# Altium PCB Lampda_PCB_V1_1.pcbdoc (part 1 of 2)
Units mm, origin at the board's own origin, x right, y up, seen from the top; angles counter-clockwise.
Board outline 70.99 x 71.73 mm, 2 copper layers (Top Layer, Bottom Layer); 134 components, 139 nets, 552 pads, 286 vias.
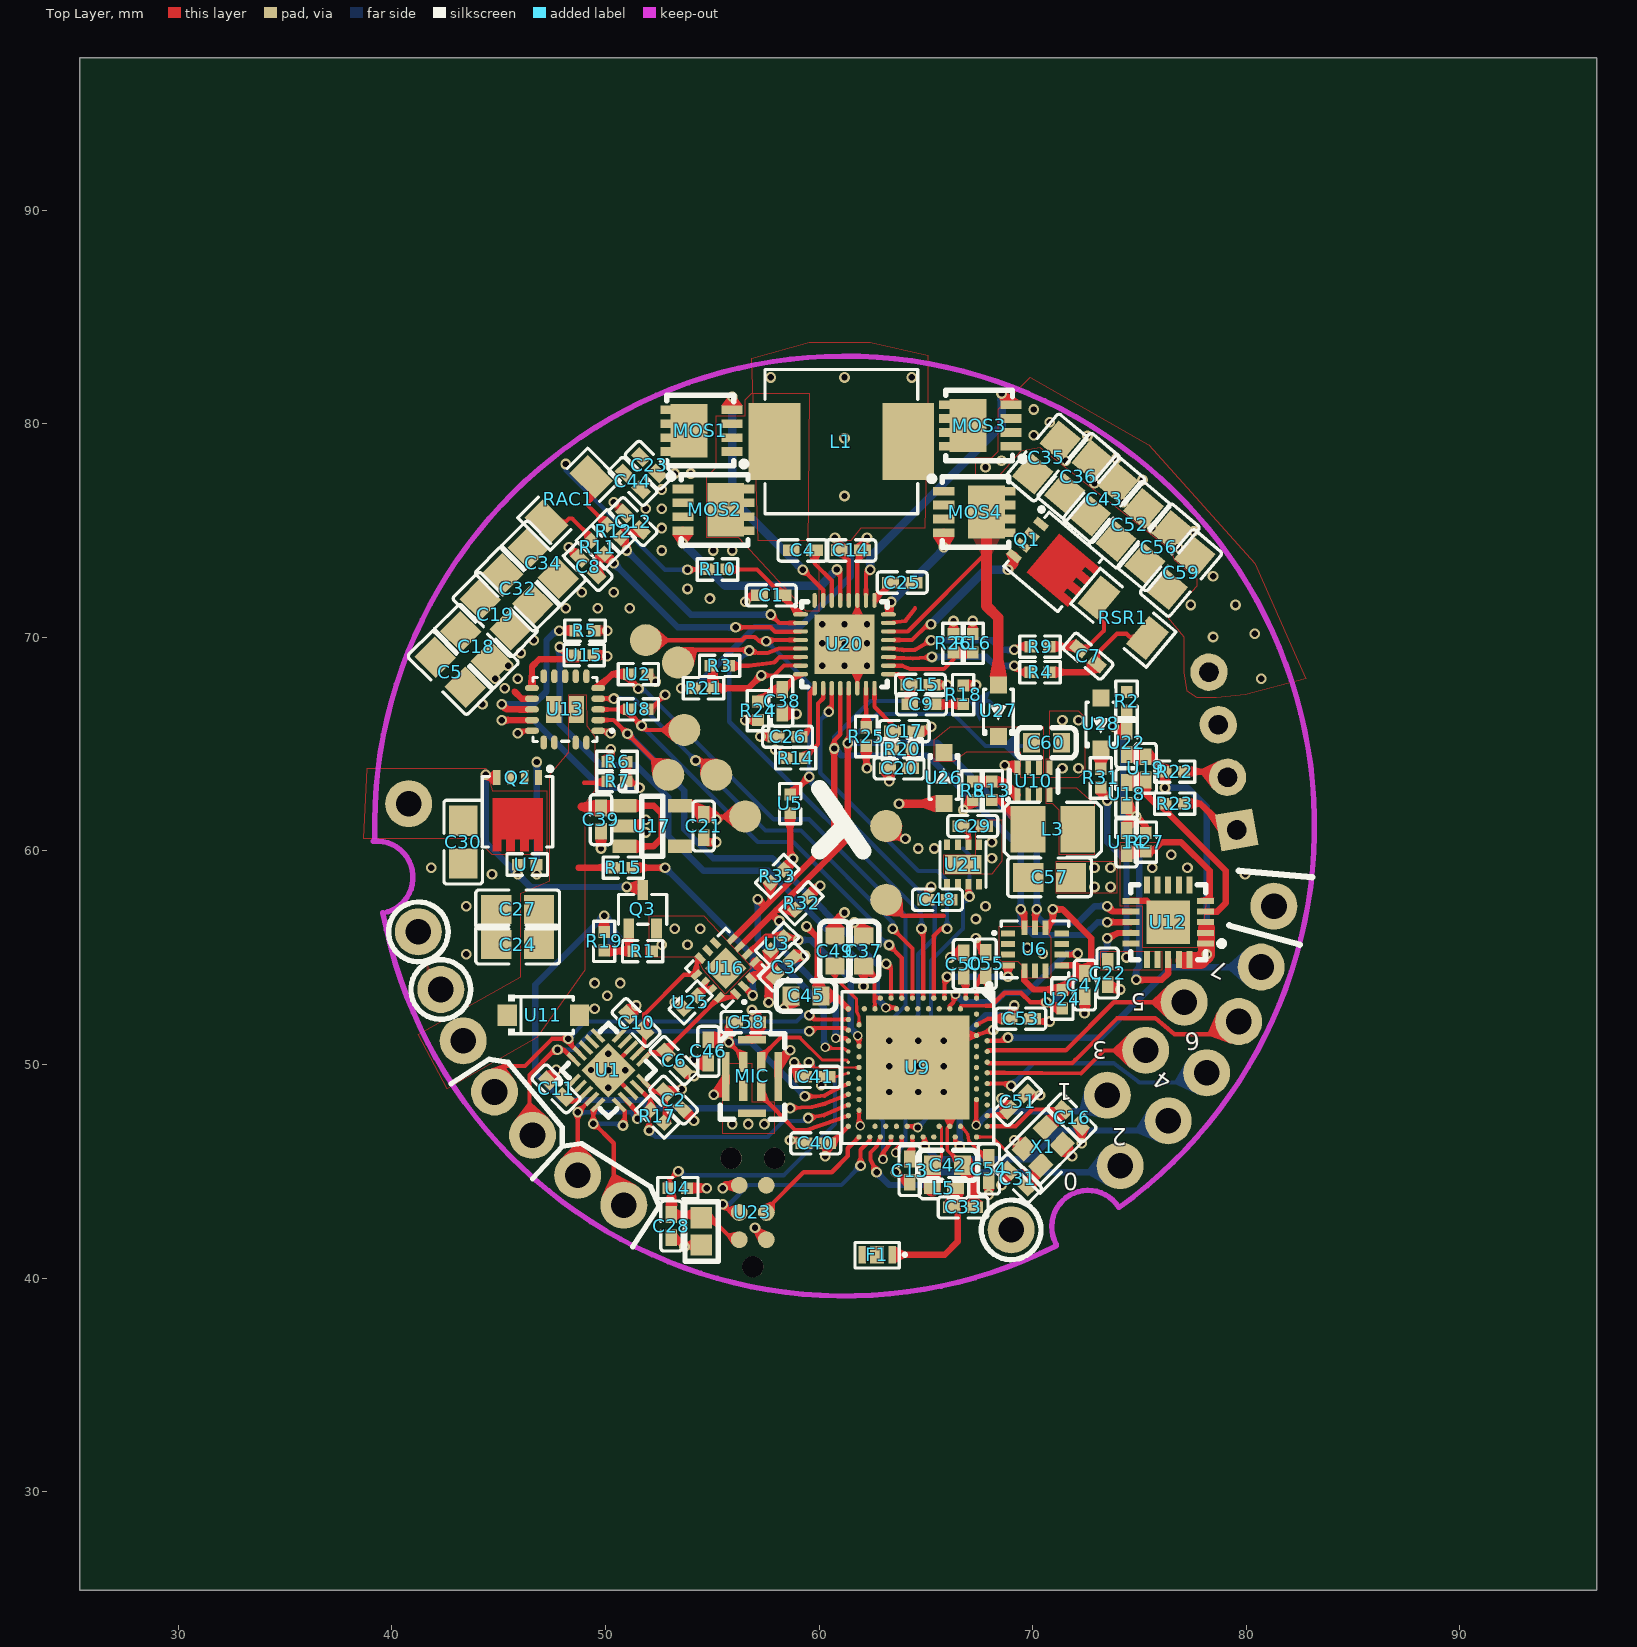
[diagram p0: Top Layer view]
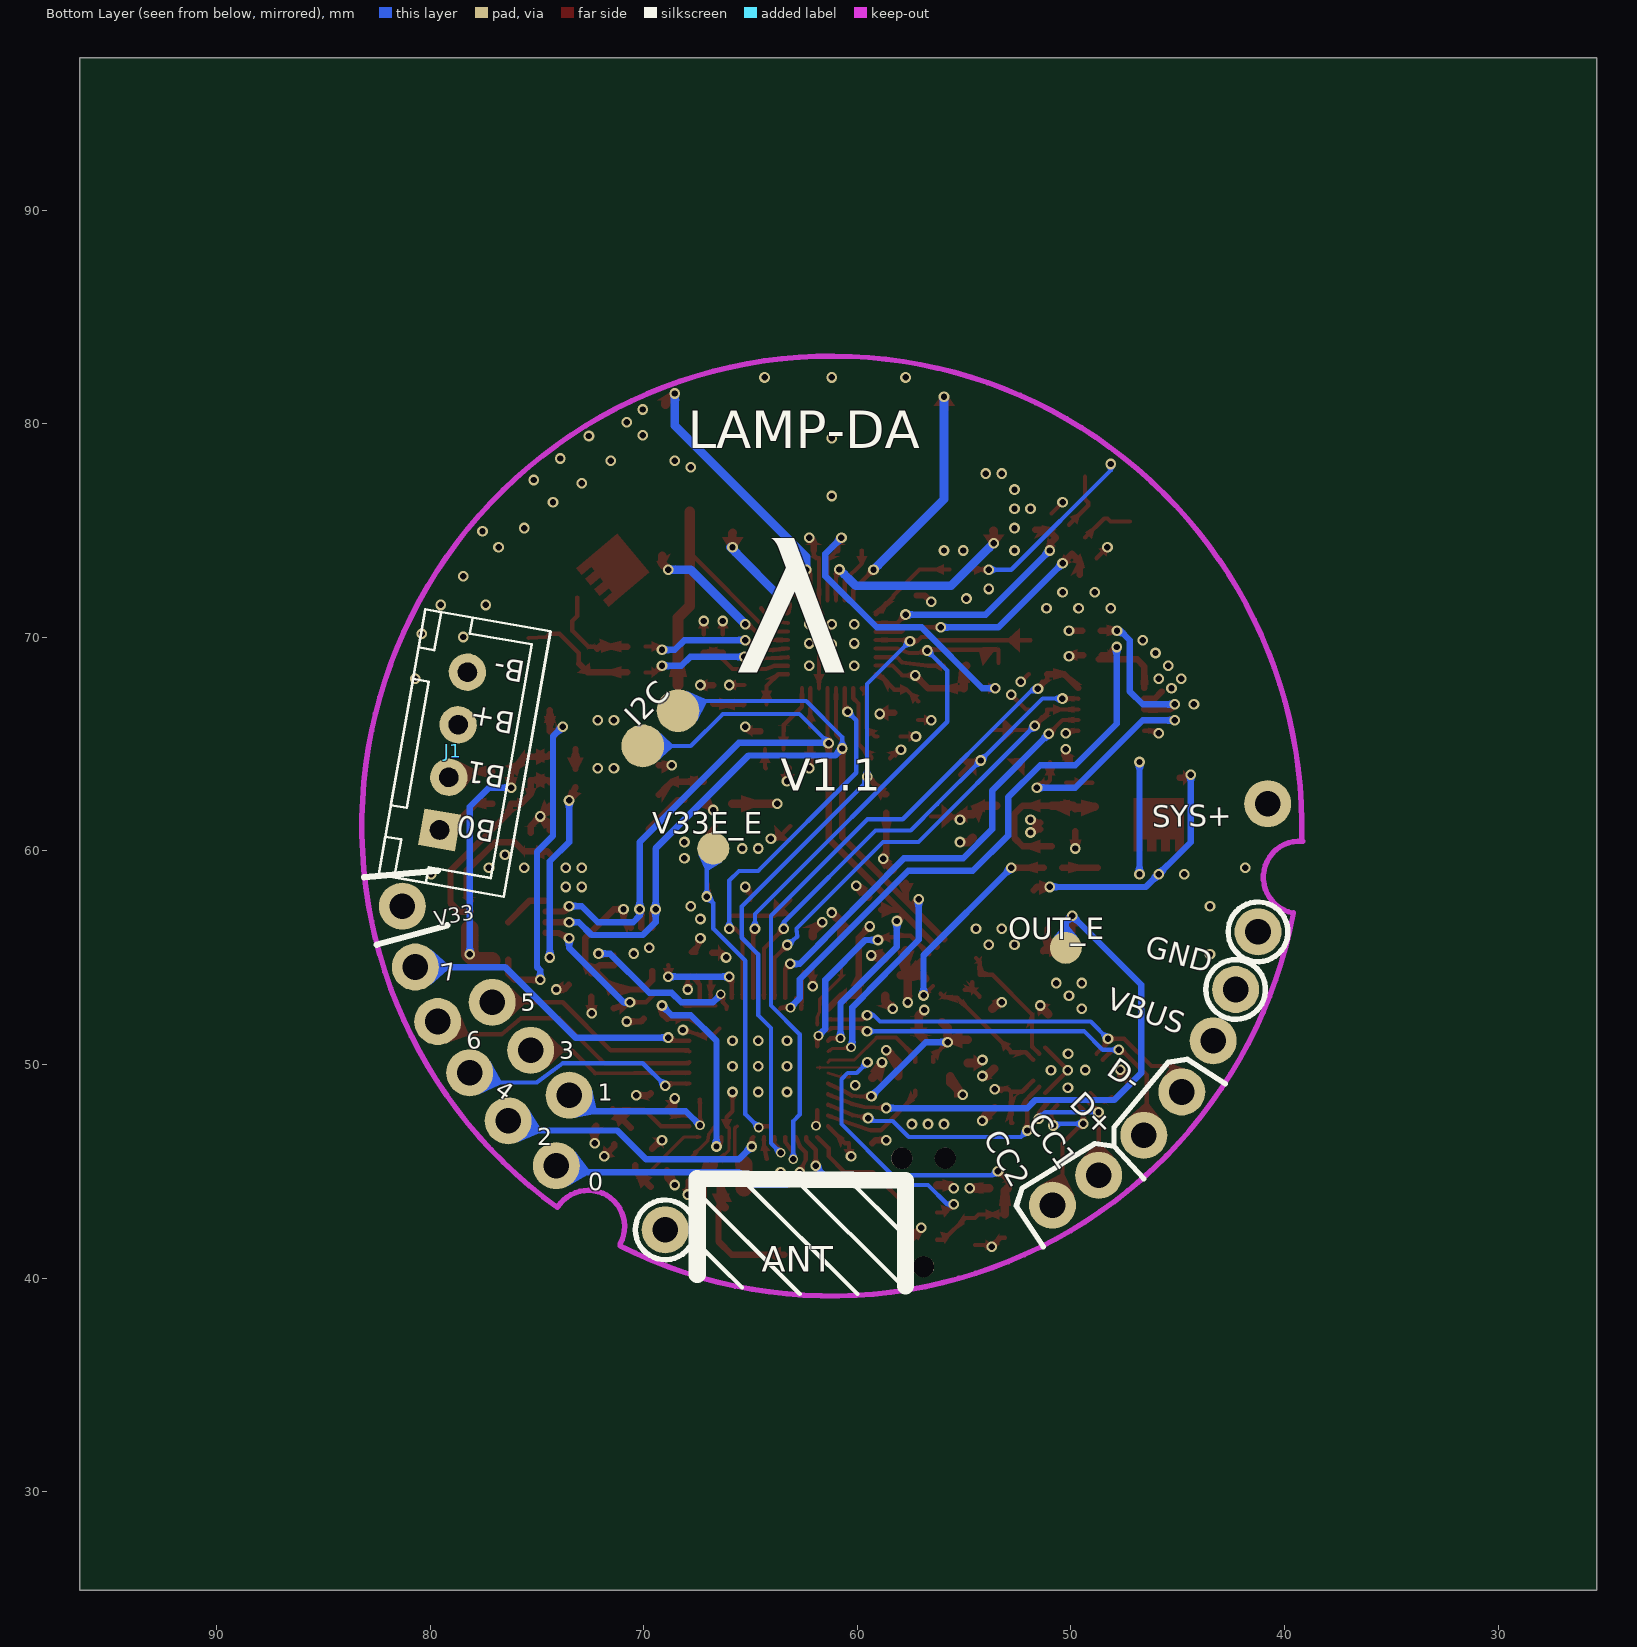
[diagram p1: Bottom Layer view, seen from below]

## Layer stack, top to bottom
Top Layer: signal copper (thickness not stored)
Dielectric: dielectric 0.32, FR-4, Dk 4.8
Bottom Layer: signal copper (thickness not stored)

## Board outline
96.394,25.4 25.4,25.4 25.4,97.126 96.394,97.126

## Components (designator, comment, footprint, x,y, rotation, side; value= is the part's Value field where it differs from the comment)
C1 "470nF" C0402 57.765,71.962 r180 top
C2 "1uF" C0402 53.193,48.34 r135 top
C3 "100nF" C0402 58.345,54.567 r225 top
C4 "47nF" C0402 59.245,74.066 r0 top
C5 "22uF" C0805 42.745,68.366 r135 top
C6 "220pF" C0402 53.218,50.19 r315 top
C7 "100nF" C0402 72.594,69.116 r140 top
C8 "33nF" C0402 49.195,73.316 r315 top
C9 "680pF" C0402 64.795,66.866 r0 top
C10 "220pF" C0402 51.44,51.968 r315 top
C11 "100nF" C0402 47.695,48.867 r135 top
C12 "33nF" C0402 51.295,75.416 r135 top
C13 "820pF" C0402 64.243,45.038 r90 top
C14 "2.2uF" C0402 61.495,74.066 r180 top
C15 "15pF" C0402 64.75,67.771 r0 top
C16 "10pF" C0402 71.845,47.517 r135 top
C17 "33pF" C0402 63.988,65.612 r0 top
C18 "22uF" C0805 43.945,69.566 r135 top
C19 "22uF" C0805 44.845,71.066 r135 top
C20 "1.8nF" C0402 63.745,63.866 r180 top
C21 "2.2uF" C0402 54.595,61.167 r90 top
C22 "1uF" C0402 73.506,54.285 r90 top
C23 "10nF" C0402 52.05,78.058 r315 top
C24 "10uF" C0805 45.895,55.617 r180 top
C25 "47nF" C0402 63.895,72.566 r180 top
C26 "100pF" C0402 58.527,65.358 r180 top
C27 "10uF" C0805 45.895,57.267 r180 top
C28 "100nF" C0402 53.091,42.443 r90 top
C29 "680pF" C0402 67.195,61.167 r0 top
C30 "10uF" C0805 43.345,60.416 r90 top
C31 "10pF" C0402 69.295,44.667 r315 top
C32 "22uF" C0805 45.895,72.266 r135 top
C33 "0.5pF" C0402 66.745,43.317 r0 top
C34 "22uF" C0805 47.095,73.466 r135 top
C35 "22uF" C0805 70.645,78.416 r50 top
C36 "22uF" C0805 72.145,77.516 r50 top
C37 "4.7uF" C0603 62.095,55.317 r90 top
C38 "100pF" C0402 58.273,67.009 r270 top
C39 "1uF" C0402 49.795,61.467 r90 top
C40 "100nF" C0402 59.845,46.317 r180 top
C41 "100nF" C0402 59.822,49.428 r180 top
C42 "0.8pF" C0603 66.02,45.292 r180 top
C43 "22uF" C0805 73.345,76.466 r50 top
C44 "1nF" C0402 51.288,77.296 r315 top
C45 "4.7uF" C0603 59.395,53.217 r180 top
C46 "100nF" C0402 54.824,50.622 r270 top
C47 "100nF" C0402 72.446,53.723 r90 top
C48 "1uF" C0402 65.545,57.717 r0 top
C49 "4.7uF" C0603 60.745,55.317 r90 top
C50 "100nF" C0402 66.783,54.69 r90 top
C51 "100nF" C0402 69.295,48.267 r45 top
C52 "22uF" C0805 74.545,75.266 r50 top
C53 "1uF" C0402 69.45,52.15 r180 top
C54 "100pF" C0402 67.95,45.11 r90 top
C55 "1uF" C0402 67.795,54.717 r90 top
C56 "22uF" C0805 75.894,74.216 r50 top
C57 "22uF" C0805 70.794,58.767 r180 top
C58 "1uF" C0402 56.583,51.985 r180 top
C59 "22uF" C0805 76.944,73.016 r50 top
C60 "4.7uF" C0603 70.645,65.066 r180 top
F1 "ANT1608LL14R2400A" ANT-SMD_3P-L1.6-W0.8_ANT1608LL14R2400A 62.719,41.101 r180 top
J1 "JST-XH 4" 4PIN_2.54_MM_JST_XHP_JST_CONNECTOR_FOR_DC_SOCKET 76.494,57.867 r190 bottom
L1 "2.2uH" IND-SMD_L7.0-W6.6_FXL0630 61.045,79.166 r180 top
L3 "DFE252012PD 2.2uH" L1008 70.945,61.017 r180 top
L5 "4.7nH" L0402 65.845,44.217 r0 top
MIC "MP34DT05TR-A" MIC-SMD_5P-L3.0-W4.0-P0.85-BL 56.868,49.45 r270 top
MOS1 "SIS412DN-T1-GE3" POWERPAK-1212-8_L3.0-W3.0-P0.65-LS3.3-BL 54.443,79.675 r90 top
MOS2 "SIS412DN-T1-GE3" POWERPAK-1212-8_L3.0-W3.0-P0.65-LS3.3-BL 55.115,75.971 r270 top
MOS3 "SIS412DN-T1-GE3" POWERPAK-1212-8_L3.0-W3.0-P0.65-LS3.3-BL 67.495,79.916 r90 top
MOS4 "SIS412DN-T1-GE3" POWERPAK-1212-8_L3.0-W3.0-P0.65-LS3.3-BL 67.322,75.866 r270 top
Q1 "DMP3018SFVQ-7" DFN-8_L3.3-W3.3-P0.65-BL-2 70.345,74.066 r230 top
Q2 "DMP3018SFVQ-7" DFN-8_L3.3-W3.3-P0.65-BL-2 45.895,62.666 r180 top
Q3 "BSS138W-TP-ES" SOT-323-3_L2.0-W1.3-P1.30-LS2.3-BR 51.745,57.267 r270 top
R1 "100kΩ" R0402 51.745,55.317 r0 top
R2 "10Ω" R0402 74.394,67.016 r90 top
R3 "10kΩ" R0402 55.345,68.666 r180 top
R4 "10Ω" R0402 70.345,68.366 r0 top
R5 "470Ω" R0402 49.045,70.316 r180 top
R6 "40.2kΩ" R0402 50.545,64.166 r180 top
R7 "619kΩ" R0402 50.545,63.266 r180 top
R8 "137kΩ" R0402 67.195,62.817 r270 top
R9 "10Ω" R0402 70.345,69.566 r0 top
R10 "1Ω" R0402 55.25,73.177 r0 top
R11 "4.99Ω" R0402 49.645,74.216 r135 top
R12 "4.99Ω" R0402 50.395,74.966 r315 top
R13 "619kΩ" R0402 68.095,62.817 r90 top
R14 "30kΩ" R0402 58.908,64.342 r180 top
R15 "4.7kΩ" R0402 50.845,59.216 r0 top
R16 "30kΩ" R0402 67.195,69.716 r270 top
R17 "100kΩ" R0402 52.431,47.578 r315 top
R18 "10kΩ" R0402 66.745,67.317 r90 top
R19 "10Ω" R0402 49.945,55.767 r270 top
R20 "40.2kΩ" R0402 63.895,64.766 r0 top
R21 "10Ω" R0402 54.595,67.616 r0 top
R22 "10Ω" R0402 76.644,63.716 r0 top
R23 "10Ω" R0402 76.644,62.217 r0 top
R24 "137kΩ" R0402 57.145,66.566 r270 top
R25 "10kΩ" R0402 62.21,65.358 r270 top
R26 "40.2kΩ" R0402 66.295,69.716 r90 top
R27 "10Ω" R0402 75.294,60.416 r90 top
R31 "100Ω" R0402 73.194,63.417 r90 top
R32 "4.7kΩ" R0402 59.187,57.556 r45 top
R33 "4.7kΩ" R0402 58.044,58.826 r45 top
RAC1 "10mΩ" R1206 48.295,76.466 r45 top
RSR1 "10mΩ" R1206 74.245,70.916 r320 top
U1 "TPD8S300" WQFN-20_L3.0-W3.0-P0.40-TL-EP 50.145,49.737 r45 top
U2 "10kΩ" R0402 51.543,68.279 r180 top
U3 "10kΩ" R0402 58.044,55.651 r45 top
U4 "10kΩ" R0402 53.395,44.217 r0 top
U5 "10kΩ" R0402 58.645,62.217 r270 top
U6 "LSM6DS3TR" LGA-14_L3.0-W2.5-P0.50-TL 70.109,55.397 r0 top
U7 "10kΩ" R0402 46.345,59.367 r180 top
U8 "10kΩ" R0402 51.543,66.628 r180 top
U9 "NRF52840-QIAA-R" AQFN-73_L7.0-W7.0-P0.50-BL-EP4.8 64.624,49.863 r180 top
U10 "TPS629206QDRLRQ1" SOT-583-8_L2.1-W1.6-P0.50-LS1.6-BL 70.045,63.266 r0 top
U11 "PTVS24VS1UR" SOD-123_L2.6-W1.7-LS3.5-RD 47.095,52.317 r0 top
U12 "BQ76905RGRR" VQFN-20_L3.5-W3.5-P0.50-TL-EP2.1 76.345,56.667 r180 top
U13 "UCS3205T-E/Q8A" VQFN-19_L3.0-W3.0-P0.50-TL-EP 48.114,66.628 r180 top
U14 "220nF" C0402 74.394,60.416 r270 top
U15 "10kΩ" R0402 49.003,69.168 r0 top
U16 "FUSB302MPX" MLP-14_L2.5-W2.5-P0.50-BL-EP 55.631,54.508 r45 top
U17 "AP2205-50W5-7" SOT-25-5_L2.9-W1.6-P0.95-LS2.8-BL 52.195,61.167 r270 top
U18 "220nF" C0402 74.394,62.666 r90 top
U19 "220nF" C0402 75.294,63.866 r90 top
U20 "BQ25713RSNR" QFN-32_L4.0-W4.0-P0.40-TL-EP2.8 61.194,69.676 r0 top
U21 "TPS22965DSGR" UDFN-8_L2.0-W2.0-P0.50-TL-EP 66.745,59.367 r90 top
U22 "220nF" C0402 74.394,65.066 r90 top
U23 "TC2030-IDC-NL" TC2030-IDC-NL 56.901,43.078 r90 top
U24 "10kΩ" R0402 71.394,53.067 r90 top
U25 "10kΩ" R0402 53.995,52.917 r225 top
U26 "PMEG3010BEA,115" SOD-323_L1.7-W1.3-LS2.5-RD 65.845,63.417 r270 top
U27 "PMEG3010BEA,115" SOD-323_L1.7-W1.3-LS2.5-RD 68.395,66.566 r90 top
U28 "PMEG3010BEA,115" SOD-323_L1.7-W1.3-LS2.5-RD 73.194,65.966 r90 top
X1 "32MHz" CRYSTAL-SMD_4P-L2.0-W1.6-BL 70.494,46.167 r45 top

## Footprints (in the part's own frame and the unit in brackets; to place one, negate y for a bottom-side part, rotate by r counter-clockwise, add the part's x,y. Pads: shape width x height; smd on the part's side, far side on the other; paste and mask are expansions set on the pad)
4PIN_2.54_MM_JST_XHP_JST_CONNECTOR_FOR_DC_SOCKET [mm]
  rect 1.75x1.75 hole 0.9 slot 0.905 at 90 deg paste+0 mask+0.102: 1(-3.556,2.54)
  round 1.75 hole 0.9 paste+0 mask+0.102: 2(-3.556,5.04) 4(-3.556,10.04)
  round 1.75 hole 0.9 slot 0.905 at 90 deg paste+0 mask+0.102: 3(-3.556,7.54)
  silkscreen extent -6.01,-0.01 -0.06,12.59
ANT-SMD_3P-L1.6-W0.8_ANT1608LL14R2400A [mm]
  rect 0.35x0.8 smd paste+0 mask+0.05: 1(-0.7,0) 2(0.7,0)
  rect 0.66x0.8 smd paste+0 mask+0.05: 2(0,0)
  silkscreen extent -1.37,-0.58 1.04,0.62
AQFN-73_L7.0-W7.0-P0.50-BL-EP4.8 [mm]
  rect 4.85x4.85 smd paste-100 mask+0.051: 0(0,0)
  round 0.25 smd paste-100 mask+0.051: A8(-3.25,-1.25) A10(-3.25,-0.75) A12(-3.25,-0.25) A14(-3.25,0.25) A16(-3.25,0.75) A18(-3.25,1.25) A20(-3.25,1.75) A22(-3.25,2.25) A23(-3.25,2.75) AA24(2.25,3.25) AB2(2.5,-2.75) AC5(2.75,-2) AC9(2.75,-1) AC11(2.75,-0.5) AC13(2.75,0) AC15(2.75,0.5) AC17(2.75,1) AC19(2.75,1.5) AC21(2.75,2) AC24(2.75,3.25) AD2(3.25,-2.75) AD4(3.25,-2.25) AD6(3.25,-1.75) AD8(3.25,-1.25) AD16(3.25,0.75) AD18(3.25,1.25) AD20(3.25,1.75) AD22(3.25,2.25) AD23(3.25,2.75) B1(-2.75,-3.25) B3(-2.75,-2.5) B5(-2.75,-2) B7(-2.75,-1.5) B9(-2.75,-1) B11(-2.75,-0.5) B13(-2.75,0) B15(-2.75,0.5) B17(-2.75,1) B19(-2.75,1.5) B24(-2.75,3.25) C1(-2.25,-3.25) D2(-2,-2.75) D23(-2,2.75) E24(-1.75,3.25) F2(-1.5,-2.75) F23(-1.5,2.75) G1(-1.25,-3.25) H2(-1,-2.75) H23(-1,2.75) J1(-0.75,-3.25) J24(-0.75,3.25) K2(-0.5,-2.75) L1(-0.25,-3.25) L24(-0.25,3.25) M2(0,-2.75) N1(0.25,-3.25) N24(0.25,3.25) P2(0.5,-2.75) P23(0.5,2.75) R1(0.75,-3.25) R24(0.75,3.25) T2(1,-2.75) T23(1,2.75) U1(1.25,-3.25) U24(1.25,3.25) V23(1.5,2.75) W1(1.75,-3.25) W24(1.75,3.25) Y2(2,-2.75) Y23(2,2.75)
  round 0.2 smd paste-100 mask+0.051: AD10(3.25,-0.75)
  round 0.152 smd paste-100 mask+0.051: AD12(3.25,-0.25) AD14(3.25,0.25)
  silkscreen extent -3.55,-3.95 3.55,3.55
C0402 [mm]
  rect 0.79x0.54 smd paste-100 mask+0.051: 1(-0.545,0) 2(0.545,0)
  silkscreen extent -1.17,-0.5 1.17,0.5
C0603 [mm]
  rect 0.8x0.9 smd paste+0 mask+0.051: 1(-0.7,0) 2(0.7,0)
  silkscreen extent -1.39,-0.71 1.39,0.71
C0805 [mm]
  rect 1.41x1.35 smd paste-100 mask+0.051: 1(-1,0) 2(1,0)
  silkscreen extent -1.96,-0.9 1.96,0.9
CRYSTAL-SMD_4P-L2.0-W1.6-BL [mm]
  rect 0.9x0.8 smd paste+0 mask+0.051: 1(-0.7,-0.55) 2(0.7,-0.55) 3(0.7,0.55) 4(-0.7,0.55)
  silkscreen extent -1.65,-1.45 1.35,1.15
DFN-8_L3.3-W3.3-P0.65-BL-2 [mm]
  rect 0.35x0.7 smd paste-100 mask+0.051: 1(-0.975,-0.765) 2(-0.325,-0.765) 3(0.325,-0.765) 4(0.975,-0.765)
  Top Layer region: -1.176,0.187 -1.176,2.115 -1.176,2.115 -1.176,2.685 -0.775,2.685 -0.775,2.115 -0.526,2.115 -0.526,2.685 -0.125,2.685 -0.125,2.115 0.125,2.115 0.125,2.685 0.525,2.685 0.525,2.115 0.774,2.115 0.774,2.685 0.774,2.115 0.774,2.685 1.176,2.685 1.176,2.115 1.176,2.115 1.176,0.187
  silkscreen extent -1.65,-1.28 1.65,2.48
IND-SMD_L7.0-W6.6_FXL0630 [mm]
  rect 2.424x3.62 smd paste+0 mask+0.051: 1(3.128,0) 2(-3.128,0)
  silkscreen extent -3.58,-3.38 3.58,3.38
L0402 [mm]
  rect 0.79x0.54 smd paste-100 mask+0.051: 1(-0.545,0) 2(0.545,0)
  silkscreen extent -1.17,-0.5 1.17,0.5
L1008 [mm]
  rect 1.635x2.16 smd paste-100 mask+0.051: 1(-1.168,0) 2(1.167,0)
  silkscreen extent -2.27,-1.27 2.27,1.3
LGA-14_L3.0-W2.5-P0.50-TL [mm]
  rect 0.675x0.28 smd paste+0 mask+0.051: 1(-1.262,0.75) 2(-1.262,0.25) 3(-1.262,-0.25) 4(-1.262,-0.75) 8(1.262,-0.75) 9(1.262,-0.25) 10(1.262,0.25) 11(1.262,0.75)
  rect 0.28x0.675 smd paste+0 mask+0.051: 5(-0.5,-1.012) 6(0,-1.012) 7(0.5,-1.012) 12(0.5,1.012) 13(0,1.012) 14(-0.5,1.012)
  silkscreen extent -1.98,-1.33 1.58,1.33
MIC-SMD_5P-L3.0-W4.0-P0.85-BL [mm]
  rect 0.95x0.4 smd paste+0 mask+0.051: 1(-0.675,-0.425) 2(0.675,-0.425) 3(0.675,0.425) 4(-0.675,0.425)
  rect 0.35x1.3 smd paste+0 mask+0.051: 5(-1.725,0) 5(1.725,0)
  rect 2.3x0.35 smd paste+0 mask+0.051: 5(0,1.225) 5(0,-1.225)
  silkscreen extent -2,-1.5 2,1.52
MLP-14_L2.5-W2.5-P0.50-BL-EP [mm]
  rect 0.28x0.505 smd paste-100 mask+0.051: 1(-0.5,-1.177) 2(0,-1.177) 3(0.5,-1.177) 8(0.5,1.178) 9(0,1.178) 10(-0.5,1.178)
  rect 0.505x0.28 smd paste-100 mask+0.051: 4(1.178,-0.75) 5(1.178,-0.25) 6(1.178,0.25) 7(1.178,0.75) 11(-1.177,0.75) 12(-1.177,0.25) 13(-1.177,-0.25) 14(-1.177,-0.75)
  rect 1.375x1.375 smd paste-100 mask+0.051: 15(0,0)
  silkscreen extent -1.33,-1.8 1.33,1.33
POWERPAK-1212-8_L3.0-W3.0-P0.65-LS3.3-BL [mil]
  rect 15.98x39.02 smd paste-3937.01 mask+1.97: 1(-38.38,-58.5) 2(-12.79,-58.5) 3(12.8,-58.5) 4(38.39,-58.5)
  rect 15.98x30 smd paste-3937.01 mask+1.97: 5(38.39,58.5) 6(12.8,58.5) 7(-12.79,58.5) 8(-38.38,58.5)
  rect 98.42x67.99 smd paste-3937.01 mask+1.97: 8(0,20.5)
  silkscreen extent -66,-85 65,61
QFN-32_L4.0-W4.0-P0.40-TL-EP2.8 [mm]
  oval 0.7x0.2 smd paste-100 mask+0.051: 1(-2.057,1.4) 2(-2.057,1) 3(-2.057,0.6) 4(-2.057,0.2) 5(-2.057,-0.2) 6(-2.057,-0.6) 7(-2.057,-1) 8(-2.057,-1.4) 17(2.057,-1.4) 18(2.057,-1) 19(2.057,-0.6) 20(2.057,-0.2) 21(2.057,0.2) 22(2.057,0.6) 23(2.057,1) 24(2.057,1.4)
  oval 0.2x0.7 smd paste-100 mask+0.051: 9(-1.4,-2.057) 10(-1,-2.057) 11(-0.6,-2.057) 12(-0.2,-2.057) 13(0.2,-2.057) 14(0.6,-2.057) 15(1,-2.057) 16(1.4,-2.057) 25(1.4,2.057) 26(1,2.057) 27(0.6,2.057) 28(0.2,2.057) 29(-0.2,2.057) 30(-0.6,2.057) 31(-1,2.057) 32(-1.4,2.057)
  rect 2.8x2.8 smd paste-100 mask+0.051: 33(0,0)
  silkscreen extent -2.31,-2 2,2
R0402 [mm]
  rect 0.566x0.54 smd paste-100 mask+0.051: 1(-0.433,0) 2(0.433,0)
  silkscreen extent -0.94,-0.5 0.94,0.5
R1206 [mm]
  rect 1.208x1.701 smd paste-100 mask+0.051: 1(-1.479,0) 2(1.479,0)
  silkscreen extent -2.31,-1.08 2.31,1.08
SOD-123_L2.6-W1.7-LS3.5-RD [mm]
  rect 0.9x1 smd paste+0 mask+0.051: 1(-1.693,0) 2(1.693,0)
  silkscreen extent -1.63,-0.94 1.41,0.94
SOD-323_L1.7-W1.3-LS2.5-RD [mm]
  rect 0.8x0.8 smd paste+0 mask+0.051: 1(-1.2,0) 2(1.2,0)
  silkscreen extent -1.1,-0.7 1,0.7
SOT-25-5_L2.9-W1.6-P0.95-LS2.8-BL [mil]
  rect 24.5x43.5 smd paste+0 mask+2: 1(-37.39,-51.18) 2(-0.03,-51.18) 3(37.39,-51.18) 4(37.39,51.18) 5(-37.39,51.18)
  silkscreen extent -75,-60 56,20
SOT-323-3_L2.0-W1.3-P1.30-LS2.3-BR [mm]
  rect 0.936x0.5 smd paste+0 mask+0.051: 1(0.898,-0.65) 2(0.898,0.65) 3(-0.898,0)
  silkscreen extent -0.7,-1.13 0.7,1.13
SOT-583-8_L2.1-W1.6-P0.50-LS1.6-BL [mm]
  rect 0.28x0.68 smd paste+0 mask+0.051: 1(-0.75,-0.64) 2(-0.25,-0.64) 3(0.25,-0.64) 4(0.75,-0.64) 5(0.75,0.64) 6(0.25,0.64) 7(-0.25,0.64) 8(-0.75,0.64)
  silkscreen extent -1.27,-0.92 1.14,0.51
TC2030-IDC-NL [mil]
  round 31 smd paste+0: 1(-50,-25) 2(-50,25) 3(0,-25) 4(0,25) 5(50,-25) 6(50,25)
  round 39 hole 39 unplated paste+0: ""(-100,0) ""(100,-40) ""(100,40)
UDFN-8_L2.0-W2.0-P0.50-TL-EP [mm]
  rect 0.505x0.28 smd paste+0 mask+0.051: 1(-0.928,0.75) 2(-0.928,0.25) 3(-0.928,-0.25) 4(-0.928,-0.75) 5(0.928,-0.75) 6(0.928,-0.25) 7(0.928,0.25) 8(0.928,0.75)
  rect 0.9x1.7 smd paste+0 mask+0.051: 9(0,0)
  silkscreen extent -1.56,-1.08 1.08,1.08
VQFN-19_L3.0-W3.0-P0.50-TL-EP [mm]
  oval 0.65x0.3 smd paste+0 mask+0.05: 1(-1.55,1) 2(-1.55,0.5) 3(-1.55,0) 4(-1.55,-0.5) 5(-1.55,-1) 11(1.55,-1) 12(1.55,-0.5) 13(1.55,0) 14(1.55,0.5) 15(1.55,1)
  oval 0.3x0.65 smd paste+0 mask+0.05: 6(-1,-1.55) 7(-0.5,-1.55) 8(0,-1.55) 9(0.5,-1.55) 10(1,-1.55) 16(1,1.55) 17(0.5,1.55) 19(-0.5,1.55) 20(-1,1.55)
  rect 0.715x1.26 smd paste+0 mask+0.05: 21(-0.535,0) 22(0.535,0)
  silkscreen extent -2.27,-1.5 1.5,1.5
VQFN-20_L3.5-W3.5-P0.50-TL-EP2.1 [mm]
  rect 0.8x0.28 smd paste-100 mask+0.05: 1(-1.751,1.001) 2(-1.751,0.501) 3(-1.751,0.001) 4(-1.751,-0.499) 5(-1.749,-1) 11(1.749,-0.999) 12(1.751,-0.501) 13(1.749,0.001) 14(1.749,0.501) 15(1.749,1.001)
  rect 0.28x0.8 smd paste-100 mask+0.05: 6(-0.999,-1.751) 7(-0.499,-1.751) 8(0.001,-1.751) 9(0.501,-1.751) 10(1.001,-1.751) 16(0.999,1.751) 17(0.499,1.751) 18(-0.001,1.751) 19(-0.501,1.751) 20(-1.001,1.751)
  rect 2.05x2.05 smd paste-100 mask+0.05: 21(-0.001,0.001)
  silkscreen extent -2.62,-1.75 1.75,1.75
WQFN-20_L3.0-W3.0-P0.40-TL-EP [mm]
  rect 0.8x0.2 smd paste+0 mask+0.051: 1(-1.5,0.8) 2(-1.5,0.4) 3(-1.5,0) 4(-1.5,-0.4) 5(-1.5,-0.8) 11(1.5,-0.8) 12(1.5,-0.4) 13(1.5,0) 14(1.5,0.4) 15(1.5,0.8)
  rect 0.2x0.8 smd paste+0 mask+0.051: 6(-0.8,-1.5) 7(-0.4,-1.5) 8(0,-1.5) 9(0.4,-1.5) 10(0.8,-1.5) 16(0.8,1.5) 17(0.4,1.5) 18(0,1.5) 19(-0.4,1.5) 20(-0.8,1.5)
  rect 1.8x1.8 smd paste+0 mask+0.051: 21(0,0)
  silkscreen extent -2.13,-1.55 1.55,1.55

## Free pads (board coordinates)
  rect 1x1 smd paste-100 mask+0.051: 1(54.488,41.554) 1(54.488,42.824)
  round 1.5 smd paste+0 mask+0.051: 2(52.944,63.567) 3(53.694,65.667) 4(56.544,61.617) 9(63.144,61.167) 9(63.144,57.717) 11(55.194,63.567) ""(51.894,69.867) ""(53.394,68.816)
  round 1.5 smd far side paste+0 mask+0.051: 10(66.744,60.117) 12(50.244,55.467)
  round 2 smd far side paste+0 mask+0.051: 10(68.392,66.568) 10(70.041,64.918)
  round 2.2 hole 1.2 paste+0 mask+0.051: ""(40.794,62.217) ""(41.245,56.216) ""(42.295,53.517) ""(43.345,51.117) ""(44.811,48.721) ""(46.589,46.689) ""(48.706,44.816) ""(50.867,43.422) ""(68.993,42.267) ""(73.493,48.568) ""(74.093,45.267) ""(75.293,50.668) ""(76.343,47.367) ""(77.092,52.918) ""(78.144,49.617) ""(79.644,52.017) ""(80.693,54.568) ""(81.295,57.417)

## Via types
v1: diameter 0.5, hole 0.3, Top Layer to Bottom Layer, tented both sides, 276 vias
v2: diameter 0.45, hole 0.3, Top Layer to Bottom Layer, tented both sides, 10 vias

## Nets (pads, with @x,y where several pads share a name; then routed paths per layer and width w, separated by ;. In a path a pad name is that pad's centre, name@x,y a point inside that pad or via, vN(x,y) a via of type N, cw(c..) or ccw(c..) an arc to the next point about the centre after c; other vN are vias at no path point)
AIN0: pad.@79.644,52.017 U9.A12 | length 13.2
  Top Layer w0.2: U9.A12@67.873,50.113 67.92,50.066 70.295,50.066 71.843,50.066 72,50.223 73.943,52.167 75.744,52.167 76.643,51.417 79.046,51.417 pad.@79.646,52.017
AIN1: U9.B13
AIN3: U9.K2
AIN4: U9.B11
AIN5: pad.@77.092,52.918 U9.A10 | length 10.2
  Top Layer w0.2: U9.A10@67.873,50.613 67.927,50.666 69.395,50.666 71.546,50.666 ; 71.546,50.665 73.793,52.916 pad.@77.095,52.916
AIN6: U9.B9
AIN7: pad.@80.693,54.568 U9.A8 | length 14.3
  Top Layer w0.2: U9.A8@67.873,51.113 68.691,51.112 v1@68.846,51.267
  Bottom Layer w0.3: v1(68.844,51.267) 73.193,51.267 75.838,53.911 76.493,54.567 pad.@80.693,54.568
ANT: C42.2 L5.1 U9.H23 | length 3.2
  Top Layer w0.152: C42.2@65.321,45.292 65.739,45.71 65.739,47.037 U9.H23@65.622,47.114
  Top Layer w0.8: L5.1@65.299,44.217 65.299,45.321 C42.2@65.325,45.347
BAT0: J1.1 R23.2 | length 3
  Top Layer w0.3: R23.2@77.078,62.217 77.845,62.217 79.077,60.985 J1.1@79.557,60.985
BAT1: J1.2 R22.2 | length 2.2
  Top Layer w0.3: R22.2@77.077,63.716 78.595,63.716 78.863,63.448 J1.2@79.121,63.448
BAT+: C7.1 J1.3 R2.2 R4.2 RSR1.2 U28.2 | length 5.7
  Top Layer w0.2: C7.1@73.012,68.766 73.044,68.798 73.044,69.266 73.946,70.168 74.394,70.166 74.545,70.016 RSR1.2@75.378,69.967
  Top Layer w0.3: R4.2@70.777,68.367 72.613,68.366 C7.1@73.012,68.766
C9_2: C9.2 R18.1 | length 1.4
  Top Layer w0.3: C9.2@65.34,66.867 65.357,66.884 R18.1@66.744,66.884
C13_2: C13.2 U9.N24 | length 1
  Top Layer w0.2: C13.2@64.242,45.583 64.374,46.196 U9.N24@64.374,46.613
C33_1: C33.1 F1.1 L5.2 | length 5.9
  Top Layer w0.3: F1.1@63.419,41.101 65.879,41.1 66.499,41.722 C33.1@66.499,43.317
  Top Layer w0.4: C33.1@66.199,43.317 66.39,43.506 L5.2@66.39,44.217
C50_1: C50.1 U9.C1 | length 1.1
  Top Layer w0.2: C50.1@66.783,54.144 66.873,54.054 U9.C1@66.873,53.113
C54_2: C54.2 U9.D23 | length 2.1
  Top Layer w0.152: U9.D23@66.624,47.113 66.653,47.142 66.959,46.743 67.004,46.436 67.786,45.657 C54.2@67.951,45.657
CC1: pad.@48.706,44.816 U1.4 U1.7 | length 7.9
  Top Layer w0.2: pad.@48.706,44.816 48.706,47.765 49.333,48.392 U1.4@49.368,48.393 ; U1.7@50.933,48.392 51.481,47.726 v1(51.505,47.469)
  Bottom Layer w0.2: v1(48.711,47.77) 51.204,47.77 v1(51.505,47.469)
CC2: pad.@50.867,43.422 U1.5 U1.6 | length 7.7
  Top Layer w0.2: U1.5@49.651,48.115 49.427,47.894 49.427,47.285 50.395,46.317 pad.@50.395,43.421 ; U1.6@50.641,48.11 50.908,47.831 50.908,47.231 v1(50.826,47.149)
  Bottom Layer w0.2: v1(49.427,47.233) 50.742,47.233 v1(50.826,47.149)
CELL0: R23.1 U12.4 U18.2 U19.1 | length 9.6
  Top Layer w0.3: U18.2@74.394,63.212 74.504,63.321 U19.1@75.294,63.321 ; U19.1@75.294,63.321 75.295,62.667 75.744,62.217 R23.1@76.212,62.217 76.345,61.767 79.044,59.068 79.044,57.567 78.645,57.165 U12.4@78.096,57.165
CELL1: R22.1 U12.1 U12.2 U12.3 U12.19 U12.20 U19.2 U22.1 | length 15.5
  Top Layer w0.3: U22.1@74.394,64.521 74.504,64.412 75.294,64.412 75.516,64.412 R22.1@76.212,63.716 76.212,62.984 v1(76.194,62.967) ; U12.2@78.095,56.166 78.095,55.216 v1(78.144,55.167)
  Top Layer w0.8: 77.095,54.872 77.85,54.872 v1(78.144,55.167) 78.144,56.368
  Bottom Layer w0.3: v1(76.194,62.967) 77.245,62.967 78.144,62.067 v1(78.144,55.167)
CELL2: R2.1 U12.18 U22.2 | length 16.3
  Top Layer w0.3: v1(73.794,65.816) 73.999,65.612 U22.2@74.394,65.612 R2.1@74.394,66.584 ; v1(74.844,53.967) 76.046,53.967 76.346,54.267 U12.18@76.346,54.915
  Bottom Layer w0.3: v1(73.794,65.816) 74.246,65.365 74.246,60.715 74.995,59.966 74.995,59.367 74.995,54.567 74.844,54.417 v1(74.844,53.967)
CELL-: R27.1 U12.5 U14.2 | length 6.2
  Top Layer w0.3: U14.2@74.394,59.871 74.507,59.984 R27.1@75.294,59.984 ; R27.1@75.294,59.984 75.612,59.985 76.044,60.416 76.946,60.416 78.294,59.068 78.294,57.869 U12.5@78.094,57.666
CH_ACN: C12.1 R12.2 U20.2 | length 11.4
  Top Layer w0.2: v1(57.744,71.067) 58.135,70.675 U20.2@59.138,70.675
  Top Layer w0.3: v1(50.994,74.067) 50.994,74.367 R12.2@50.701,74.66 51.072,75.031 C12.1@51.68,75.031
  Bottom Layer w0.3: v1(50.994,74.067) 53.994,71.067 v1(57.744,71.067)
CH_ACP: C8.2 R11.1 U20.3 | length 11.8
  Top Layer w0.2: v1(56.094,70.467) 57.744,70.467 57.947,70.264 U20.3@59.138,70.264
  Top Layer w0.3: C8.2@49.58,72.931 49.58,73.54 R11.1@49.951,73.91 ; R11.1@49.951,73.91 v1(50.394,73.467)
  Bottom Layer w0.3: v1(50.394,73.467) 53.394,70.467 v1(56.094,70.467)
CH_BATDRV: Q1.4 U20.21 | length 7.7
  Top Layer w0.2: U20.21@63.252,69.875 64.352,69.875 65.094,70.617 v1@65.244,70.617
  Top Layer w0.4: v1(68.844,73.166) 69.132,73.454 Q1.4@69.132,73.811
  Bottom Layer w0.4: v1@65.244,70.617 67.794,73.167 v1@68.846,73.167
  other v1: 65.243,70.617
CH_BATPREZ: R16.2 R26.1 U20.18 | length 4.5
  Top Layer w0.2: U20.18@63.252,68.677 63.895,68.666 64.268,68.516 65.845,68.516 66.295,68.967 R26.1@66.295,69.284
  Top Layer w0.3: R26.1@66.295,69.284 R16.2@67.195,69.284
CH_BTST1: C4.2 U20.30 | length 2.7
  Top Layer w0.2: C4.2@59.79,74.067 59.79,73.464 60.595,72.659 U20.30@60.594,71.732
CH_BTST2: C25.2 U20.25 | length 1.1
  Top Layer w0.2: U20.25@62.595,71.732 63.349,72.487 C25.2@63.349,72.567
CH_CHARGE_OK: pad.@51.894,69.867 U5.1 U9.R24 U20.4 | length 37.5
  Top Layer w0.2: pad.@51.894,69.865 56.394,69.865 56.545,70.016 56.994,70.018 57.187,69.825 v1@57.537,69.825 ; v1(57.536,69.824) 57.588,69.875 U20.4@59.138,69.875 ; v2(63.594,45.868) 63.593,46.015 63.875,46.297 U9.R24@63.875,46.614
  Top Layer w0.3: U5.1@58.645,62.649 58.715,62.649 v1(59.544,63.478)
  Bottom Layer w0.2: v1@57.537,69.825 59.544,67.815 59.544,63.478 59.544,63.266 65.414,57.396 65.414,55.936 64.644,55.166 64.644,52.316 64.045,51.717 64.045,46.319 v2(63.594,45.868)
CH_CMPOUT: R25.1 U20.15 | length 1.8
  Top Layer w0.2: U20.15@62.194,67.618 R25.1@62.211,65.791
CH_COMP1: C17.1 R20.1 U20.16 | length 3.2
  Top Layer w0.2: U20.16@62.595,67.617 62.595,66.751 63.443,65.903 C17.1@63.443,65.612 63.462,65.592 R20.1@63.462,64.767
CH_COMP2: C9.1 C15.1 U20.17 | length 2.1
  Top Layer w0.2: U20.17@63.251,68.275 63.7,68.275 C15.1@64.205,67.771 64.249,67.727 C9.1@64.249,66.867
CH_EN_OTG: pad.@53.394,68.816 U9.L1 U20.5 | length 26.9
  Top Layer w0.2: pad.@53.394,68.816 53.394,69.426 56.697,69.426 v1@56.73,69.375 ; v1(56.73,69.382) 57.145,69.266 57.593,69.266 58.124,69.477 U20.5@59.138,69.474 ; v1(64.794,56.366) 64.873,56.368 U9.L1@64.874,53.113
  Bottom Layer w0.2: v1(56.73,69.382) 55.795,68.448 55.795,66.05 64.794,57.051 v1(64.794,56.366)
CH_HIDRV1: MOS1.4 U20.31 | length 11.9
  Top Layer w0.2: v1(59.245,73.166) 60.194,72.217 U20.31@60.194,71.732
  Top Layer w0.4: MOS1.4@55.928,80.65 55.929,81.251 v1(55.945,81.267)
  Bottom Layer w0.4: v1(55.945,81.267) 55.945,76.466 v1(59.245,73.166)
CH_HIDRV2: MOS4.4 U20.24 | length 4.9
  Top Layer w0.4: 63.295,71.216 63.251,71.526 v1(63.378,71.653) ; MOS4.4@65.836,74.891 65.846,74.881 v1@65.846,74.216
  Bottom Layer w0.4: v1@63.379,71.653 65.942,74.216 v1@65.846,74.216
  other v1: 65.844,74.217
CH_IADPT: C38.1 R24.1 U20.8 | length 2.5
  Top Layer w0.2: R24.1@57.145,66.999 57.699,67.554 C38.1@58.273,67.554 58.995,68.275 U20.8@59.138,68.275
CH_IBAT: C26.1 U20.9 | length 2.6
  Top Layer w0.2: C26.1@59.073,65.358 59.166,65.358 59.568,65.76 59.568,67.392 U20.9@59.794,67.618
CH_ILIMHIZ: R3.1 U20.6 | length 3.3
  Top Layer w0.2: R3.1@55.945,68.666 56.695,68.666 57.908,68.829 58.15,69.073 U20.6@59.138,69.07
CH_INT_N: U3.2 U9.AC9 U16.5 | length 9.3
  Top Layer w0.2: U16.5@56.641,55.164 57.509,56.032 58.044,56.032 U3.2@58.35,55.957 58.911,55.957 v1(59.036,55.833) ; v2(61.82,51.36) 61.873,51.307 U9.AC9@61.873,50.863
  Bottom Layer w0.3: v1@59.036,55.832 59.628,55.832 61.495,53.965 61.495,51.686 v2(61.82,51.36)
CH_LODRV1: MOS2.4 U20.29 | length 10.5
  Top Layer w0.2: v1(60.838,73.177) 60.995,73.021 U20.29@60.994,71.732
  Top Layer w0.4: v1(53.617,74.411) 53.617,74.985 MOS2.4@53.629,74.996
  Bottom Layer w0.4: v1@53.618,74.412 55.615,72.415 60.077,72.415 v1@60.839,73.177
CH_LODRV2: MOS3.4 U20.26 | length 13
  Top Layer w0.2: U20.26@62.194,71.732 62.194,72.967 v1(62.394,73.166)
  Top Layer w0.4: v1(68.545,81.416) 68.98,80.981 MOS3.4@68.98,80.891
  Bottom Layer w0.4: v1(62.394,73.166) 62.394,73.767 68.543,79.913 v1(68.545,81.416)
CH_PROC_HOT: U9.J1 U20.11 | length 18.1
  Top Layer w0.2: v1(60.457,66.522) 60.595,66.659 U20.11@60.594,67.618 ; U9.J1@65.374,53.113 65.374,56.02 65.72,56.366 v1(65.995,56.366)
  Bottom Layer w0.2: v1@60.458,66.523 60.052,66.116 60.052,63.66 64.644,59.068 65.544,59.068 65.996,58.616 v1@65.996,56.368
CH_PSYS: R14.1 U20.10 | length 3.6
  Top Layer w0.2: R14.1@59.341,64.342 59.341,64.39 59.949,64.998 59.949,66.903 60.194,67.148 U20.10@60.194,67.618
CH_REGN: C14.2 R21.1 U20.28 | length 16.1
  Top Layer w0.2: v1(53.545,67.617) R21.1@54.162,67.617 ; C14.2@60.949,74.066 61.396,73.617 U20.28@61.396,71.732
  Top Layer w0.3: v1(60.744,74.666) 60.949,74.462 C14.2@60.949,74.066
  Bottom Layer w0.3: v1(53.545,67.617) 54.147,67.617 56.994,70.467 59.094,70.467 61.495,72.868 61.495,73.917 v1@60.745,74.666
CH_SRN: R4.1 U20.19 | length 7
  Top Layer w0.2: U20.19@63.251,69.07 64.393,69.007 v1(65.285,69.083) ; v1(69.144,68.666) 69.445,68.366 R4.1@69.912,68.359
  Bottom Layer w0.3: v1(65.285,69.083) 67.827,69.083 68.244,68.666 v1(69.144,68.666)
CH_SRP: R9.1 U20.20 | length 7
  Top Layer w0.2: U20.20@63.252,69.474 63.534,69.474 63.964,69.4 64.494,69.416 v1(65.245,69.867) ; v1(69.144,69.416) 69.295,69.567 R9.1@69.912,69.567
  Bottom Layer w0.3: v1(65.245,69.867) 68.094,69.867 68.545,69.416 v1(69.144,69.416)
CH_SW1: C4.1 L1.1 MOS1.1 MOS1.2 MOS1.3 MOS2.5 MOS2.6 MOS2.7 MOS2.8 U20.32
CH_SW2: C25.1 L1.2 MOS3.5 MOS3.6 MOS3.7 MOS3.8 MOS4.1 MOS4.2 MOS4.3 U20.23 | length 1.5
  Top Layer w0.2: U20.23@63.252,70.675 64.045,70.766 64.495,71.366
CH_VBUS: C1.1 R10.2 U20.1 | length 4.4
  Top Layer w0.2: R10.2@55.683,73.177 57.095,73.177 C1.1@58.311,71.962 58.311,71.902 U20.1@59.138,71.075
CH_VDDA: R3.2 R16.1 R21.2 U20.7 | length 19.9
  Top Layer w0.2: v1(57.295,68.217) 57.893,68.217 58.358,68.679 U20.7@59.138,68.679 ; R16.1@67.195,70.149 v1(67.195,70.766)
  Top Layer w0.3: R21.2@55.028,67.617 56.695,67.616 ; 56.694,67.617 v1(57.295,68.217)
  Top Layer w0.4: R3.2@54.912,68.666 55.027,68.551 R21.2@55.027,67.617
  Mid-Layer 2 w0.3: v1(57.295,68.217) 58.795,69.718 58.795,71.516 59.844,72.565 65.696,72.565 67.195,71.067 v1(67.195,70.766)
D+: pad.@46.589,46.689 U1.20 U9.AD6 | length 19.8
  Top Layer w0.2: pad.@46.59,46.688 46.45,46.688 46.45,49.517 47.631,50.698 v1@47.758,50.698 ; v1(47.757,50.698) 48.052,50.698 U1.20@48.519,50.232 ; v1(59.545,51.567) 59.694,51.717 61.194,51.717 U9.AD6@61.374,51.613
  Bottom Layer w0.2: v1(47.757,50.698) 48.519,50.698 49.388,51.567 v1(59.545,51.567)
D-: pad.@44.811,48.721 U1.19 U9.AD4 | length 19.5
  Top Layer w0.2: pad.@44.811,48.721 44.811,49.531 45.217,49.936 46.233,49.936 47.503,51.206 v1(48.265,51.206) 48.265,51.051 U1.19@48.802,50.514 ; v1(59.545,52.316) 59.748,52.113 U9.AD4@61.374,52.113
  Bottom Layer w0.2: v1@48.266,51.206 49.077,52.017 58.942,52.017 59.247,52.319 v1(59.545,52.316)
DEC6: C53.2 U9.B5 U9.E24 | length 11
  Top Layer w0.2: U9.E24@66.374,46.613 66.374,46.388 v1(66.595,46.167) ; U9.B5@67.374,51.863 67.924,52.145 C53.2@68.904,52.15
  Top Layer w0.3: C53.2@68.904,52.15 69.145,52.39 v1@69.145,52.766
  Bottom Layer w0.3: v1@66.595,46.167 66.595,51.117 67.794,52.316 68.693,52.316 v1@69.145,52.766
  other v1: 69.144,52.766
DECUSB: C49.1 U9.AC5 | length 3.2
  Top Layer w0.152: C49.1@60.744,54.616 60.744,54.095 61.449,53.391 61.759,53.068 61.767,52.479 61.873,52.233 U9.AC5@61.873,51.863
FAULT: R17.1 U1.9 U9.AD20 | length 12.2
  Top Layer w0.2: U1.9@51.489,48.958 52.125,48.322 R17.1@52.125,47.884 ; v1(52.045,46.917) 52.045,47.804 R17.1@52.125,47.884 ; v1@59.503,47.506 60.231,47.635 U9.AD20@61.373,48.128
  Bottom Layer w0.2: v1(52.045,46.917) 52.343,46.617 57.596,46.617 58.345,47.366 59.244,47.366 v1(59.499,47.499)
GND: C1.2 C2.1 C3.1 C5.1 C6.2 C8.1 C10.1 C11.2 C12.2 C13.1 C14.1 C15.2 C16.1 C17.2 C18.1 C19.1 C20.2 C21.1 C22.1 C23.2 C24.2 C26.2 C27.2 C28.1 C29.2 C30.1 C31.1 C32.1 C33.2 C34.1 C35.2 C36.2 C37.2 C38.2 C39.1 C40.2 C41.2 C42.1 C43.2 C44.2 C45.2 C46.2 C47.1 C48.1 C49.2 C50.2 C51.2 C52.2 C53.1 C54.1 C55.2 C56.2 C57.1 C58.1 C59.2 C60.1 J1.4 MIC.2 MIC.5 MOS2.1 MOS2.2 MOS2.3 MOS3.1 MOS3.2 MOS3.3 pad.1@54.488,41.554 pad.@41.245,56.216 pad.@42.295,53.517 pad.@68.993,42.267 Q3.2 R1.2 R5.1 R6.2 R8.2 R14.2 R18.2 R24.2 R25.2 R26.2 R27.2 U1.8 U1.13 U1.16 U1.17 U1.18 U1.21 U2.1 U6.1 U6.2 U6.3 U6.6 U6.7 U8.1 U9.0 U9.B7 U9.F23 U10.5 U10.8 U11.2 U12.6 U12.7 U12.8 U12.11 U12.21 U13.1 U13.12 U13.15 U14.1 U16.8 U16.9 U16.15 U17.2 U18.1 U20.14 U20.27 U20.33 U21.5 U21.9 U23.6 U25.2 X1.2 X1.4 | length 70.1
  Top Layer w0.152: U9.F23@66.124,47.113 65.998,47.033 66.008,46.002 C42.1@66.72,45.292
  Top Layer w0.2: v1(45.895,65.517) 46.007,65.628 U13.15@46.565,65.628 ; v1(48.295,74.217) C8.1@48.809,73.702 ; U13.1@49.664,65.628 50.134,65.628 v1(50.245,65.517) ; v1(50.394,76.317) C12.2@50.909,75.802 ; U1.8@51.206,48.676 v1(50.145,49.737) U1.13@51.206,50.797 ; U8.1@51.975,66.628 52.105,66.628 v1(52.794,67.317) ; U2.1@51.975,68.279 52.337,67.917 v1(52.345,67.917) ; C28.1@53.091,41.898 53.285,41.898 v1(53.702,41.482) 53.774,41.554 pad.1@54.488,41.554 ; v1(56.545,66.116) 56.562,66.134 R24.2@57.145,66.134 ; v1(57.258,65.358) C26.2@57.982,65.358 ; v1@57.959,64.742 58.221,64.595 R14.2@58.476,64.342 ; U20.14@61.794,67.618 61.794,70.017 v1(61.195,70.617) v1(62.245,70.617) 61.794,71.067 61.794,71.732 61.794,73.617 62.041,73.861 C14.1@62.041,74.066 ; v1(63.595,44.967) 64.069,44.492 C13.1@64.242,44.492 ; C48.1@64.999,57.717 64.999,58.072 v1(65.245,58.317) ; C15.2@65.296,67.771 65.991,67.771 v1(65.995,67.766) ; v1(65.844,48.717) 65.843,47.818 66.123,47.539 U9.F23@66.124,47.113 ; R26.2@66.295,70.149 v1(66.295,70.766) ; U9.0@66.455,51.688 66.78,51.363 U9.B7@67.374,51.363 ; v1(67.345,55.917) 67.345,55.711 67.794,55.262 67.768,55.235 C55.2@67.544,55.235 ; U9.B7@67.375,51.364 67.469,51.417 68.074,51.625 v1(68.165,51.619) ; v1(67.945,43.917) 67.95,43.922 C54.1@67.95,44.565
  Top Layer w0.3: 45.745,67.466 46.085,67.127 U13.12@46.565,67.127 ; R5.1@49.477,70.316 v1(50.094,70.316) ; v1(49.794,60.116) C39.1@49.795,60.921 ; U17.2@51.445,61.017 51.744,61.016 v1(51.895,60.867) ; U17.2@51.445,61.316 51.745,61.316 v1@51.894,61.465 ; v1(56.545,71.666) 56.839,71.961 C1.2@57.22,71.962 ; C38.2@58.273,66.463 58.898,66.463 v1(58.945,66.416) ; v1(58.645,46.467) 59.149,46.467 C40.2@59.3,46.317 ; C14.1@62.04,74.066 62.04,74.461 v1(62.245,74.666) ; R25.2@62.21,64.925 62.21,63.901 v1(62.245,63.867) ; C20.2@63.199,63.866 63.295,63.771 v1(63.295,63.267) ; C17.2@64.534,65.612 65.04,65.612 v1(65.245,65.816) ; v1(66.144,55.016) 66.363,55.235 C50.2@66.783,55.235 ; v1(66.744,61.917) 67.195,62.366 R8.2@67.195,62.384 ; R18.2@66.744,67.749 67.328,67.749 v1(67.345,67.766) ; v1(68.545,44.366) 68.909,44.731 C31.1@68.909,45.052 ; v1@68.696,64.016 U10.8@69.295,64.016 ; v1(69.144,46.467) 69.204,46.467 X1.4@69.611,46.061 ; C51.2@69.68,48.652 69.765,48.567 v1(70.345,48.567) ; C53.1@69.995,52.15 70.128,52.016 v1(70.794,52.016) ; X1.2@71.378,46.273 71.378,46.183 v1(71.844,45.716) ; C16.1@72.23,47.131 72.295,47.067 v1(72.295,46.316) ; v1@72.429,52.408 C47.1@72.447,53.177 ; C22.1@73.506,53.74 73.729,53.517 v1(74.094,53.517) ; U12.11@74.596,57.666 75.346,57.666 U12.21@76.346,56.666 ; v1@74.845,61.615 75.295,61.166 R27.2@75.294,60.849 ; U14.1@74.394,61.166 v1(74.844,61.617) ; U14.1@74.394,61.166 U14.1@74.394,60.962 U14.1@74.394,61.166 ; U14.1@74.394,61.166 v1(74.844,61.617) ; U18.1@74.394,62.067 U18.1@74.394,62.121 U18.1@74.394,62.067 ; U18.1@74.394,62.067 v1(74.844,61.617) ; U18.1@74.394,62.067 v1(74.844,61.617)
  Top Layer w0.4: C11.2@47.309,49.252 47.695,49.637 v1(47.695,49.766) ; R6.2@50.112,64.166 50.112,64.334 50.245,64.467 v1(50.245,64.766) ; C10.1@51.055,52.354 51.444,52.743 v1(51.444,52.766) ; v1(53.245,52.917) 53.383,52.917 U25.2@53.688,52.61 ; C2.1@53.579,47.954 54.144,47.388 v1(54.144,47.366) ; C6.2@53.604,49.805 53.942,49.466 v1(54.144,49.466) ; v1(54.144,50.217) 54.285,50.076 C46.2@54.824,50.077 ; C21.1@54.595,60.621 54.8,60.416 v1(55.195,60.416) ; v1(55.072,48.587) 55.643,49.158 MIC.5@55.643,49.45 ; v1(55.495,44.217) 55.626,44.348 U23.6@56.266,44.348 ; v1(56.863,52.557) 57.128,52.292 C58.1@57.128,51.985 57.128,51.435 MIC.5@56.868,51.175 ; MIC.5@58.093,49.45 58.093,50.116 v1@58.644,50.667 ; v1(58.345,52.617) 58.694,52.966 C45.2@58.695,53.217 ; C3.1@58.73,54.952 58.889,55.111 v1(59.343,55.111) ; v1@58.833,50.122 58.962,49.675 C41.2@59.29,49.395 ; C49.2@60.745,56.016 60.745,56.666 v1(61.195,57.116) ; v1(61.645,56.666) 62.094,56.217 C37.2@62.095,56.016 ; C42.1@66.72,45.292 67.243,44.767 67.243,43.718 C33.2@67.29,43.317
  other v1: 55.945,47.217 56.694,47.217 57.444,47.217 63.294,48.717 64.645,48.717 50.142,48.92 50.937,49.739 49.328,49.748 63.294,49.917 64.644,49.917 65.844,49.917 58.846,50.103 50.137,50.51 58.644,50.667 63.294,51.117 64.644,51.117 65.844,51.117 72.428,52.407 49.495,52.617 50.094,53.217 49.495,53.817 50.695,53.817 43.494,55.167 70.466,55.198 69.744,55.466 52.644,55.617 53.845,55.617 53.245,56.366 54.444,56.366 43.495,57.416 72.895,58.317 73.645,58.317 44.695,58.917 79.944,58.917 41.845,59.217 72.895,59.217 73.645,59.217 75.594,59.217 77.245,59.217 68.094,59.666 76.494,59.816 68.094,60.416 51.894,61.467 71.394,63.867 72.144,63.867 68.695,64.016 57.958,64.741 71.394,66.116 72.144,66.116 44.244,66.867 45.295,67.617 44.845,68.066 45.894,68.066 80.695,68.066 45.444,68.666 60.144,68.666 61.194,68.666 62.245,68.666 46.045,69.267 61.194,69.675 60.144,69.716 62.244,69.716 46.645,69.867 78.444,70.016 80.394,70.166 60.144,70.617 48.145,71.366 49.644,71.366 51.145,71.366 77.394,71.516 79.494,71.516 54.894,71.816 48.895,72.116 50.394,72.116 53.844,72.267 78.444,72.867 52.644,74.066 55.044,74.067 55.944,74.067 76.794,74.217 77.544,74.967 52.645,75.116 75.594,75.116 51.895,76.016 52.645,76.016 74.245,76.317 61.195,76.617 52.645,76.917 72.894,77.217 75.144,77.367 53.245,77.666 53.995,77.666 67.794,77.967 68.545,78.267 71.544,78.267 73.914,78.374 61.195,79.317 72.564,79.424 70.045,79.466 70.794,80.066 70.045,80.666 57.744,82.167 61.194,82.166 64.344,82.166
I2CM_CLK: pad.10@70.041,64.918 R32.1 U6.13 U9.AD8 U12.12 U16.6 U20.13 | length 52.8
  Top Layer w0.2: v2(60.788,51.233) 61.254,51.233 U9.AD8@61.374,51.113 ; v1(61.346,65.049) 61.395,65.098 U20.13@61.394,67.618
  Top Layer w0.3: U16.6@56.288,55.517 61.347,60.576 v1@61.347,65.049 ; 57.809,57.038 v1@58.147,56.721 ; 58.007,57.237 R32.1@58.881,57.25 ; U6.13@70.11,56.409 70.11,57.267 v1(70.195,57.267) ; v1(73.494,57.416) 73.743,57.168 U12.12@74.594,57.167
  Bottom Layer w0.2: v1@61.347,65.049 62.714,66.416 66.295,66.416 67.795,64.917 pad.10@70.045,64.917
  Bottom Layer w0.3: v1@58.147,56.721 58.147,55.514 60.789,52.873 v2@60.789,51.232 ; v1@61.347,65.049 61.364,65.066 65.395,65.066 ; 65.394,65.067 65.544,65.067 70.195,60.416 v1(70.195,57.267) 70.194,56.967 70.494,56.667 72.145,56.667 72.894,57.417 v1(73.494,57.416)
  other v1: 58.147,56.722
I2CM_SDA: pad.10@68.392,66.568 R33.1 U6.14 U9.AD10 U12.13 U16.7 U20.12 | length 54.2
  Top Layer w0.152: v2(60.295,50.817) 60.493,50.764 61.17,50.758 U9.AD10@61.373,50.615
  Top Layer w0.2: v1@60.712,64.795 60.712,65.176 60.994,65.458 U20.12@60.994,67.618
  Top Layer w0.3: U16.7@55.934,55.871 60.712,60.65 v1(60.712,64.796) ; v1(57.131,57.738) 57.445,57.423 57.445,57.382 ; 57.738,57.695 R33.1@57.738,58.52 ; v1(69.444,57.267) 69.609,57.102 U6.14@69.609,56.41 ; v1(73.494,56.666) 73.793,56.667 U12.13@74.596,56.665
  Bottom Layer w0.2: v1(60.712,64.796) 60.712,65.334 62.395,67.017 67.944,67.017 pad.10@68.394,66.567
  Bottom Layer w0.3: v1@57.131,57.737 57.131,55.842 60.23,52.687 v2@60.232,50.858 ; v1@60.712,64.795 61.04,64.468 65.094,64.468 ; 65.095,64.467 69.444,60.117 v1(69.444,57.267) 69.445,56.667 70.047,56.065 72.445,56.065 73.044,56.665 v1(73.494,56.666)
I2S_CLK: MIC.3 U9.AD22 | length 5.1
  Top Layer w0.2: MIC.3@57.294,48.776 57.294,48.567 58.904,46.924 ; 58.899,46.926 59.369,46.924 60.87,47.429 U9.AD22@61.373,47.615
I2S_DATA: MIC.4 U9.AD12 | length 5.2
  Top Layer w0.152: 59.094,51.267 60.146,50.216 61.269,50.218 U9.AD12@61.374,50.113
  Top Layer w0.2: MIC.4@57.293,50.125 57.293,50.365 58.195,51.267 59.095,51.267
IMU_INT2: U6.9 U9.F2 | length 8.4
  Top Layer w0.2: U9.F2@66.124,52.613 66.123,52.745 66.295,52.917 66.295,53.194 v2(66.387,53.286) ; U6.9@71.371,55.147 72.066,55.147 v1(72.117,55.198)
  Bottom Layer w0.3: v2(66.387,53.286) 66.758,52.916 68.244,52.916 68.696,53.365 69.742,53.365 71.576,55.197 v1@72.117,55.197
OUT_CC1: C10.2 U1.12 U16.10 U16.11 | length 6
  Top Layer w0.2: U1.12@51.489,50.514 51.826,50.851 C10.2@51.826,51.583 51.826,52.354 53.678,54.206 U16.11@54.268,54.206 54.268,54.811 U16.10@54.445,54.987
OUT_CC2: C6.1 U1.11 U16.1 U16.14 | length 5.7
  Top Layer w0.2: U1.11@51.772,50.232 52.116,50.576 C6.1@52.833,50.576 ; C6.1@52.833,50.576 52.833,50.65 U16.14@55.33,53.144 ; U16.14@55.329,53.145 55.934,53.145 U16.1@56.11,53.322
P0.00: U9.D2 U12.14 U24.1 | length 10.8
  Top Layer w0.152: 66.633,52.752 67.805,52.755
  Top Layer w0.2: 67.804,52.758 68.056,52.755 68.696,53.365 69.445,53.365 69.894,52.917 v1(70.645,52.917)
  Top Layer w0.3: v1(70.645,52.917) U24.1@71.394,52.634 ; v1(73.494,55.917) 73.989,56.162 U12.14@74.596,56.164
  Bottom Layer w0.3: v1(70.645,52.917) 70.944,52.917 73.494,55.466 v1(73.494,55.917)
P0.07: U9.M2